# Altium PCB PCB.PcbDoc
Units mm, origin at the board's own origin, x right, y up, seen from the top; angles counter-clockwise.
Board outline 50 x 50 mm, 2 copper layers (Top Layer, Bottom Layer); 21 components, 15 nets, 60 pads, 1 vias.
Unrouted connection lines stored in the file: 8.
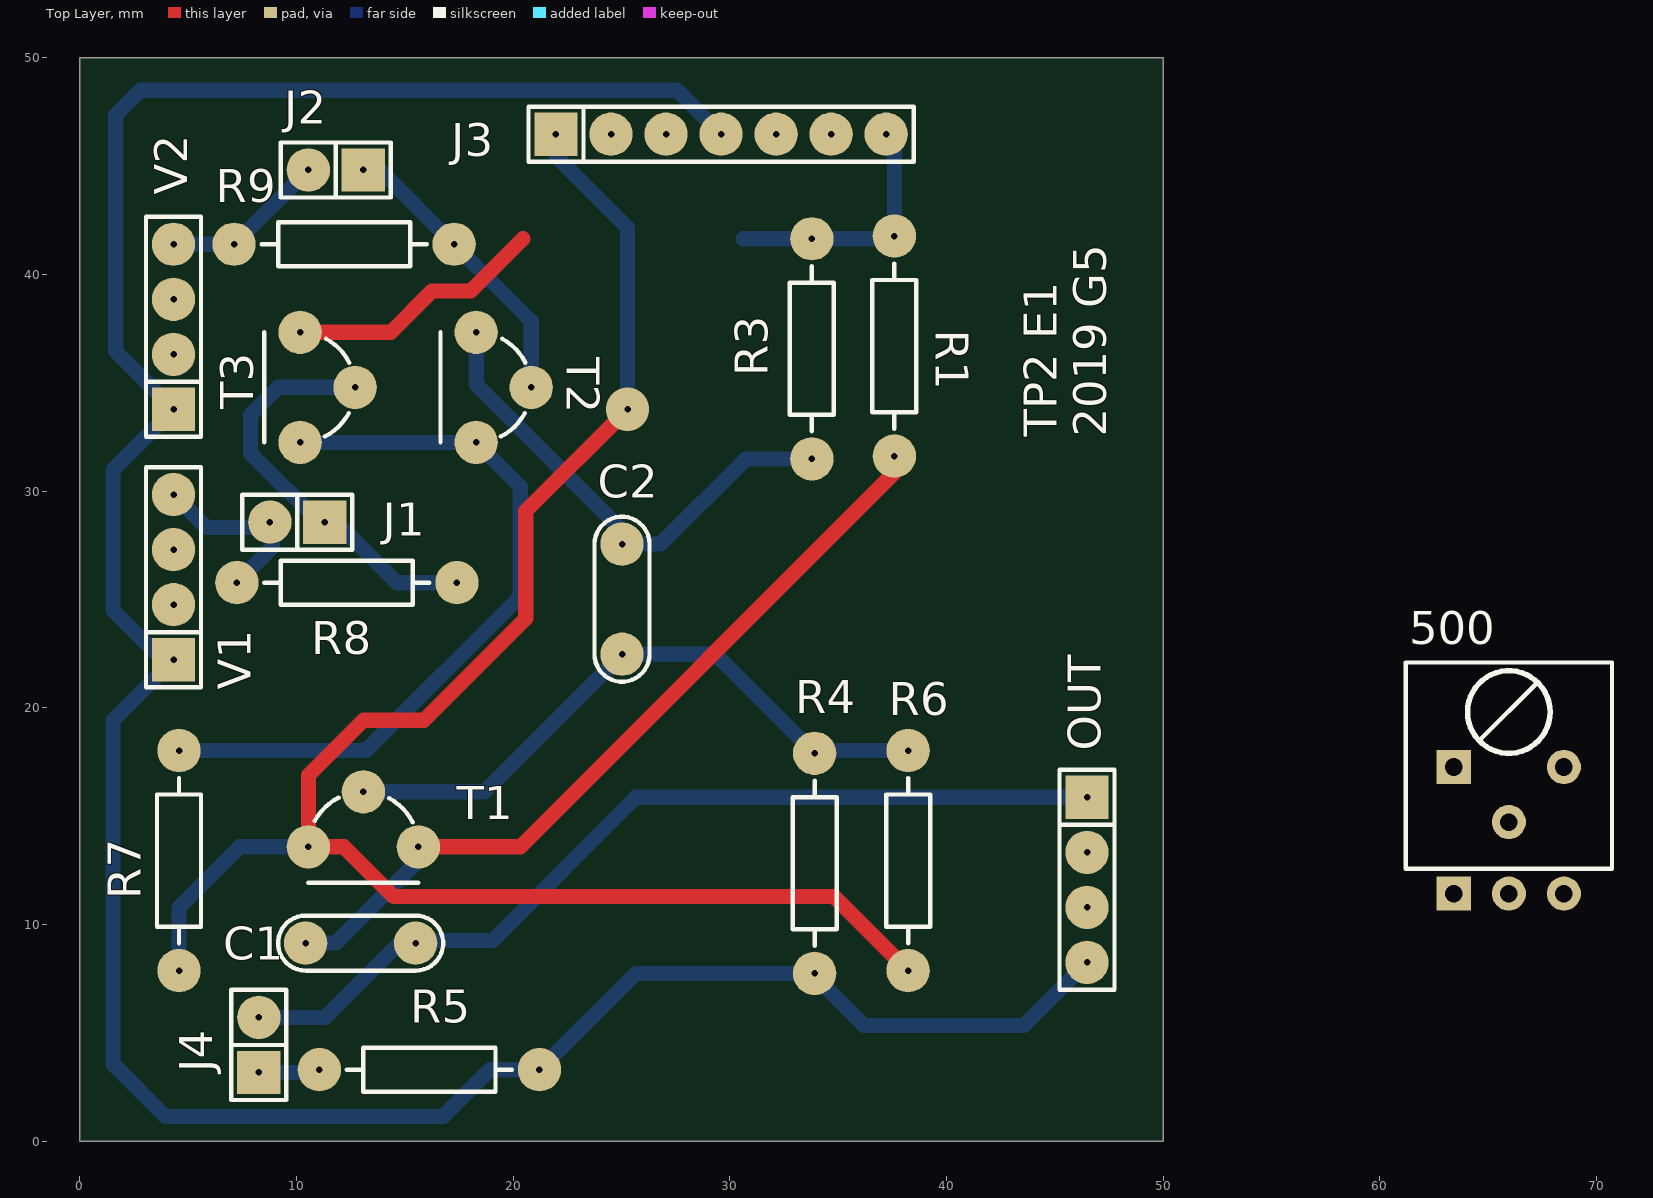
[diagram p0: Top Layer view]
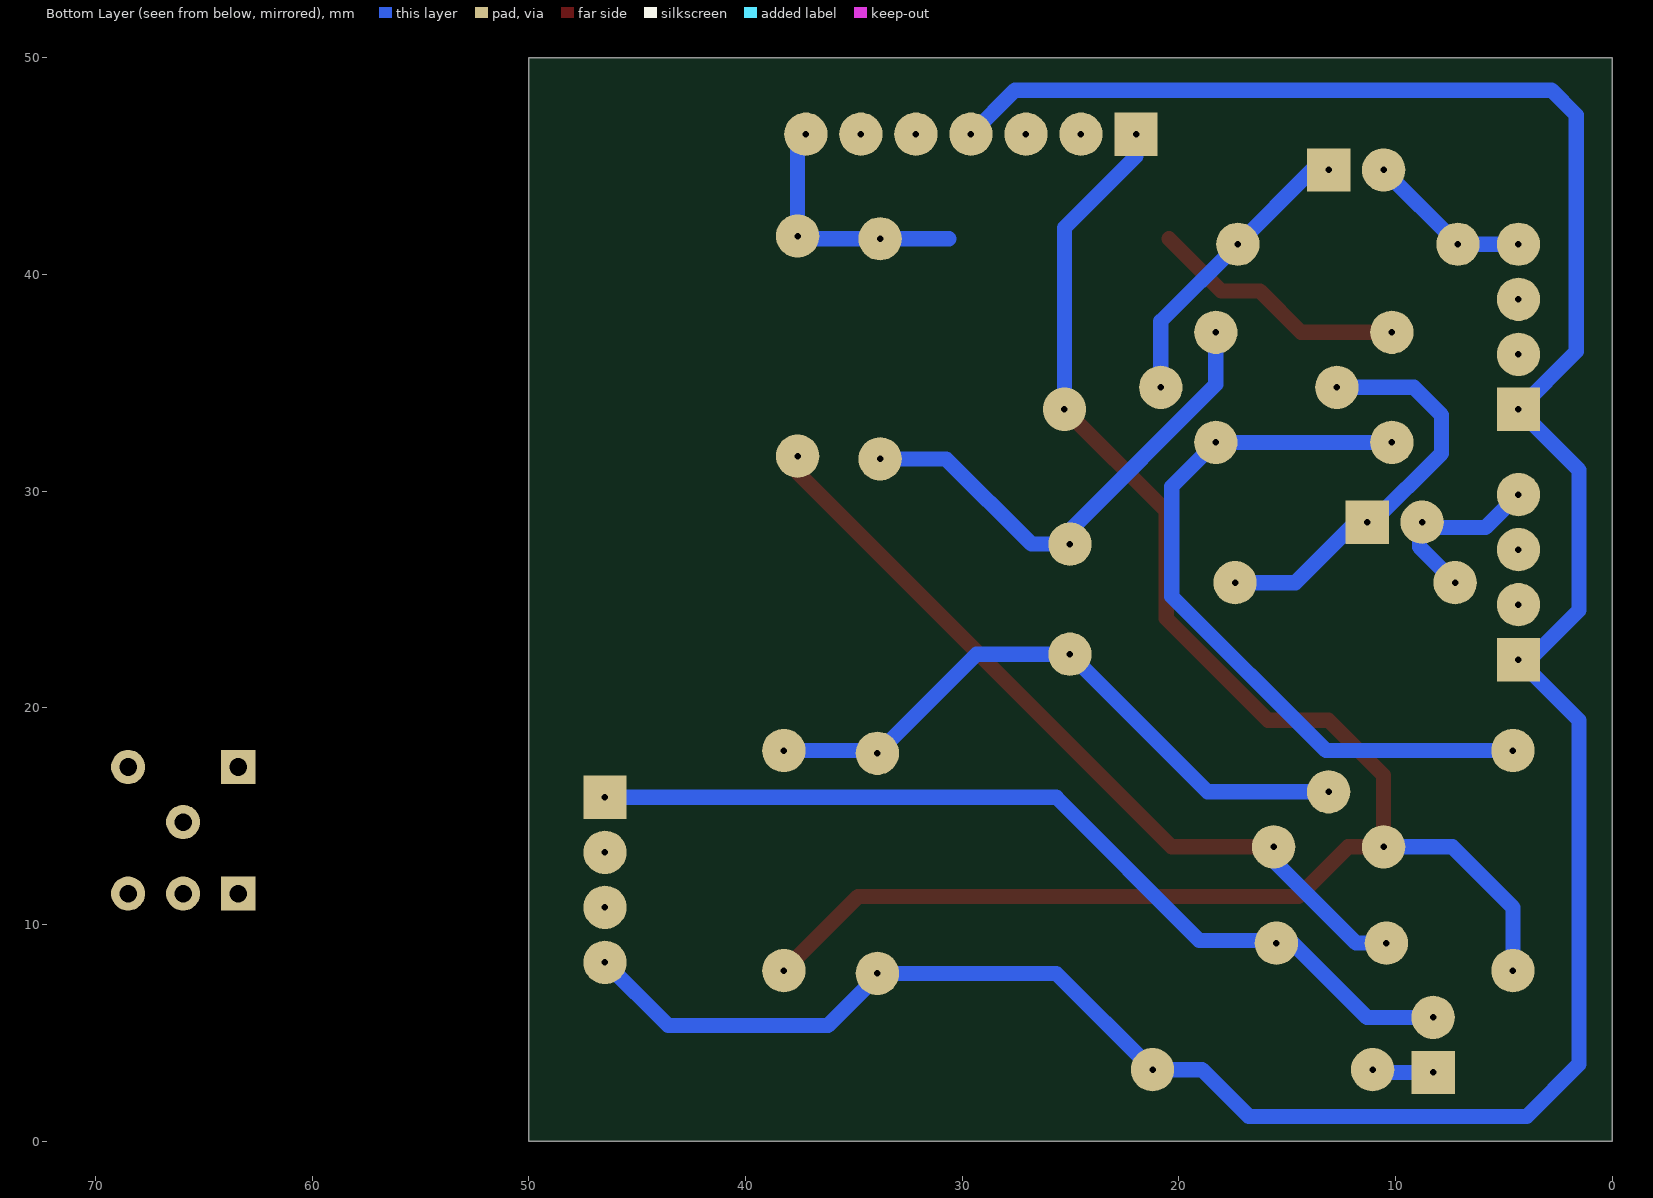
[diagram p1: Bottom Layer view, seen from below]
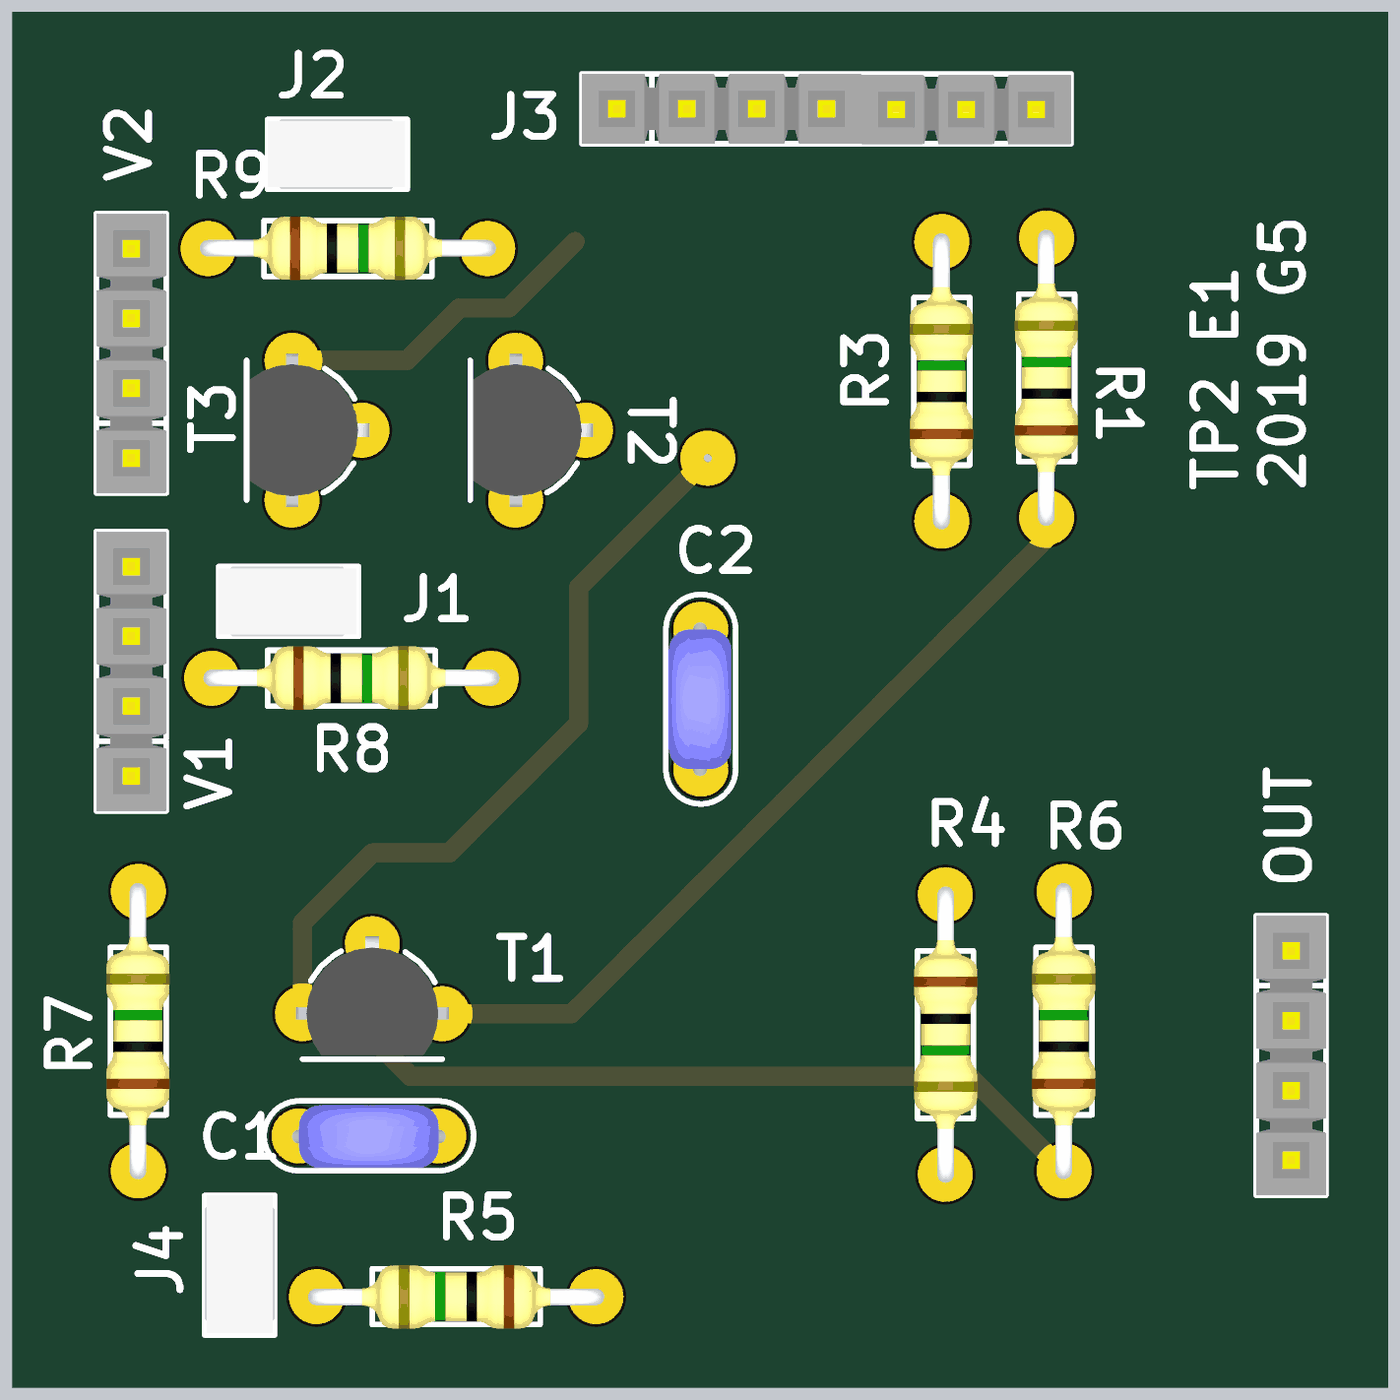
[diagram p2: 3D render of the assembled board from above, using the file's embedded part models]

## Layer stack, top to bottom
Top Solder: solder mask 0.0102, Solder Resist, Dk 3.5
Top Layer: signal copper 0.0356
Dielectric 1: dielectric 0.32, FR-4, Dk 4.8
Bottom Layer: signal copper 0.0356
Bottom Solder: solder mask 0.0102, Solder Resist, Dk 3.5

## Board outline
0,0 50,0 50,50 0,50

## Design rules (kind name [scope] priority, off if disabled: settings)
Clearance [All] p1: gap=0 ignorepadtopadclearanceinfootprint=FALSE
PolygonConnect [All] p1: connectstyle=Relief reliefconductorwidth=0.254 reliefentries=4 polygonreliefangle="90 Angle" airgapwidth=0.254
RoomDefinition Esquemático [InComponentClass('Esquemático')] p1: confinementstyle=ConfineIn formatcopy=TRUE lockcomponents=FALSE outline -43.815,-49.657 6.985,-49.657 6.985,-24.257 -43.815,-24.257
RoutingVias [All] p1: holewidth=0.711 width=1.27 viastyle="Through Hole" minholewidth=0.711 minwidth=1.27 maxholewidth=0.711 maxwidth=1.27
SolderMaskExpansion [All] p1: expansion=0.102
Width [All] p1: maxlimit=0.7 minlimit=0.7 preferedwidth=0.7 minimp=50.000000 maximp=50.000000 favimp=50.000000
30 further rules are at their usual default settings.

## Components (designator, comment, footprint, x,y, rotation, side; value= is the part's Value field where it differs from the comment)
500 "PRESET" "PRESET H" 65.913,17.272 r0 top
C1 "100n" CAP200 12.954,9.144 r0 top
C2 "100n" CAP200 25.019,25.019 r270 top
J1 "JUMPER" JUMPER2 10.033,28.574 r180 top
J2 "JUMPER" JUMPER2 11.811,44.831 r180 top
J3 "CON7" SIP7 21.971,46.482 r0 top
J4 "JUMPER" JUMPER2 8.255,4.445 r90 top
OUT "CON4" SIP4 46.482,12.065 r270 top
R1 "2.2k" RES400 37.592,31.623 r90 top
R3 "6.8k" RES400 33.782,31.496 r90 top
R4 "680" RES400 33.909,17.907 r270 top
R5 "2.2k" RES400 21.209,3.302 r180 top
R6 "6.8k" RES400 38.227,7.874 r90 top
R7 "6.8k" RES400 4.572,7.874 r90 top
R8 "570" RES400 7.239,25.781 r0 top
R9 "570" RES400 7.112,41.402 r0 top
T1 "PNP" TO92 13.081,14.859 r180 top
T2 "NPN" TO92 19.558,34.798 r90 top
T3 "NPN" TO92 11.43,34.798 r90 top
V1 "CON4" SIP4 4.318,26.035 r90 top
V2 "CON4" SIP4 4.318,37.592 r90 top

## Footprints (in the part's own frame and the unit in brackets; to place one, negate y for a bottom-side part, rotate by r counter-clockwise, add the part's x,y. Pads: shape width x height; smd on the part's side, far side on the other; paste and mask are expansions set on the pad)
CAP200 [mm]
  round 2 hole 0.3: 1(-2.54,0) 2(2.54,0)
  silkscreen extent -3.81,-1.27 3.81,1.27, body extent -2.79,-1.17 2.79,1.12, height 6.24
JUMPER2 [mm]
  rect 2x2 hole 0.3: 1(-1.27,0)
  round 2 hole 0.3: 2(1.27,0)
  silkscreen extent -2.54,-1.27 2.54,1.27, body extent -2.46,-1.27 2.54,1.27, height 9.5
"PRESET H" [mil]
  rect 62x62 hole 32: 1(-98.43,-230) 1(-98.42,0)
  round 62 hole 32: 2(1.57,-230) 2(1.57,-100) 3(101.57,-230) 3(101.57,0)
  silkscreen extent -186,-185 189,190, body extent -190,-188 185,188, height 197
RES400 [mm]
  round 2 hole 0.3: 1(0,0) 2(10.16,0)
  silkscreen extent 1.27,-1.02 8.89,1.02, body extent -0.3,-1.14 10.46,1.17, height 2.43
SIP4 [mm]
  rect 2x2 hole 0.3: 1(-3.81,0)
  round 2 hole 0.3: 2(-1.27,0) 3(1.27,0) 4(3.81,0)
  silkscreen extent -5.08,-1.27 5.08,1.27, body extent -5.08,-1.27 5.08,1.27, height 8.38
SIP7 [mm]
  rect 2x2 hole 0.3: 1(0,0)
  round 2 hole 0.3: 2(2.54,0) 3(5.08,0) 4(7.62,0) 5(10.16,0) 6(12.7,0) 7(15.24,0)
  silkscreen extent -1.27,-1.27 16.51,1.27, body extent -1.27,-1.3 16.51,1.27, height 8.38
TO92 [mm]
  round 2 hole 0.3: 1(0,-1.27) 2(2.54,1.27) 3(-2.54,1.27)
  silkscreen extent -2.54,-1 2.54,2.92, body extent -2.79,-1.55 2.79,2.79, height 8

## Part data
C1 C2: library part CAP
R1 R3 R4 R5 R6 R7 R8 R9: library part RES
T1: library part "TRANSISTOR PNP"
T2 T3: library part "TRANSISTOR NPN"

## Via types
v1: diameter 2, hole 0.3, Top Layer to Bottom Layer, 1 vias

## Nets (pads, with @x,y where several pads share a name; then routed paths per layer and width w, separated by ;. In a path a pad name is that pad's centre, name@x,y a point inside that pad or via, vN(x,y) a via of type N, cw(c..) or ccw(c..) an arc to the next point about the centre after c; other vN are vias at no path point)
GND: J3.4 OUT.4 R4.2 R5.1 V1.1 V2.1 | length 128.9
  Bottom Layer w0.7: J3.4 27.559,48.514 2.794,48.514 1.651,47.371 1.651,36.449 V2.1 1.524,30.988 1.524,24.511 3.81,22.225 V1.1 1.524,19.431 1.524,3.556 3.937,1.143 16.764,1.143 18.923,3.302 R5.1 25.654,7.747 R4.2 33.909,7.62 36.195,5.334 43.561,5.334 OUT.4
Net500_1: 500.1 T2.3 | length 12.1
  Top Layer w0.7: 10.16,37.338 14.351,37.338 16.256,39.243 18.034,39.243 20.447,41.656
Net500_2: 500.2 R7.2 | length 34.8
  Bottom Layer w0.7: R7.2 13.208,18.034 20.32,25.146 20.32,30.226 18.288,32.258 10.16,32.258
Net500_3: 500.3 T3.3
NetC1_1: C1.1 R1.1 T1.3 | length 37.3
  Top Layer w0.7: T1.3 20.32,13.589 37.592,30.861 R1.1
  Bottom Layer w0.7: C1.1 11.811,9.144 15.621,12.954 T1.3
NetC1_2: C1.2 J4.2 OUT.1 | length 42.4
  Bottom Layer w0.7: J4.2 11.303,5.715 14.859,9.271 19.05,9.271 25.654,15.875 OUT.1
NetC2_1: C2.1 R3.1 T2.2 | length 23
  Bottom Layer w0.7: T2.2 18.288,34.925 25.019,28.194 C2.1 26.797,27.559 30.734,31.496 R3.1
NetC2_2: C2.2 R4.1 R6.2 T1.1 | length 29.7
  Bottom Layer w0.7: T1.1 18.669,16.129 C2.2 29.337,22.479 R4.1 34.036,18.034 R6.2
NetJ1_2: J1.2 R8.1 V1.4 | length 9.3
  Bottom Layer w0.7: V1.4 5.842,28.321 8.255,28.321 8.89,28.956 8.89,27.432 R8.1
NetJ2_2: J2.2 R9.1 V2.4 | length 7.6
  Bottom Layer w0.7: V2.4 R9.1 J2.2
NetJ4_1: J4.1 R5.2 | length 2.8
  Bottom Layer w0.7: J4.1 10.922,3.175 R5.2
V1: J1.1 R8.2 T3.1 | length 19
  Bottom Layer w0.7: J1.1 11.05,28.574 7.874,31.75 7.874,33.528 9.144,34.798 T3.1 ; J1.1@11.558,28.828 14.605,25.781 R8.2
V2: J2.1 R9.2 T2.1 | length 13.7
  Bottom Layer w0.7: J2.1 13.843,44.831 R9.2 20.828,37.846 T2.1
VCC: J3.7 R1.2 R3.2 T3.2 | length 12.4
  Bottom Layer w0.7: 30.607,41.656 R3.2 37.465,41.656 R1.2 37.592,46.609 J3.7@37.211,46.99
VEE: J3.1 R6.1 R7.1 T1.2 | length 82.1
  Top Layer w0.7: v1(25.273,33.782) 20.574,29.083 20.574,24.13 15.875,19.431 13.081,19.431 10.541,16.891 T1.2 12.192,13.589 14.478,11.303 34.798,11.303 R6.1
  Bottom Layer w0.7: R7.1 4.572,10.795 7.366,13.589 T1.2 ; J3.1 21.971,45.466 25.273,42.164 v1(25.273,33.782)
pads on no net: J3.2 J3.3 J3.5 J3.6 OUT.2 OUT.3 V1.2 V1.3 V2.2 V2.3

## Silkscreen, mask and mechanical layers (free items; w line width, h text height)
Top Overlay:
  text "TP2 E1 / 2019 G5" at 47.371,32.512 h1.52 r90